# Altium PCB Oscilloscope.PcbDoc
Units mil, origin at the board's own origin, x right, y up, seen from the top; angles counter-clockwise.
Board outline 5995 x 4030 mil, 2 copper layers (Top Layer, Bottom Layer); 74 components, 65 nets, 283 pads, 22 vias.
Unrouted connection lines stored in the file: 1.
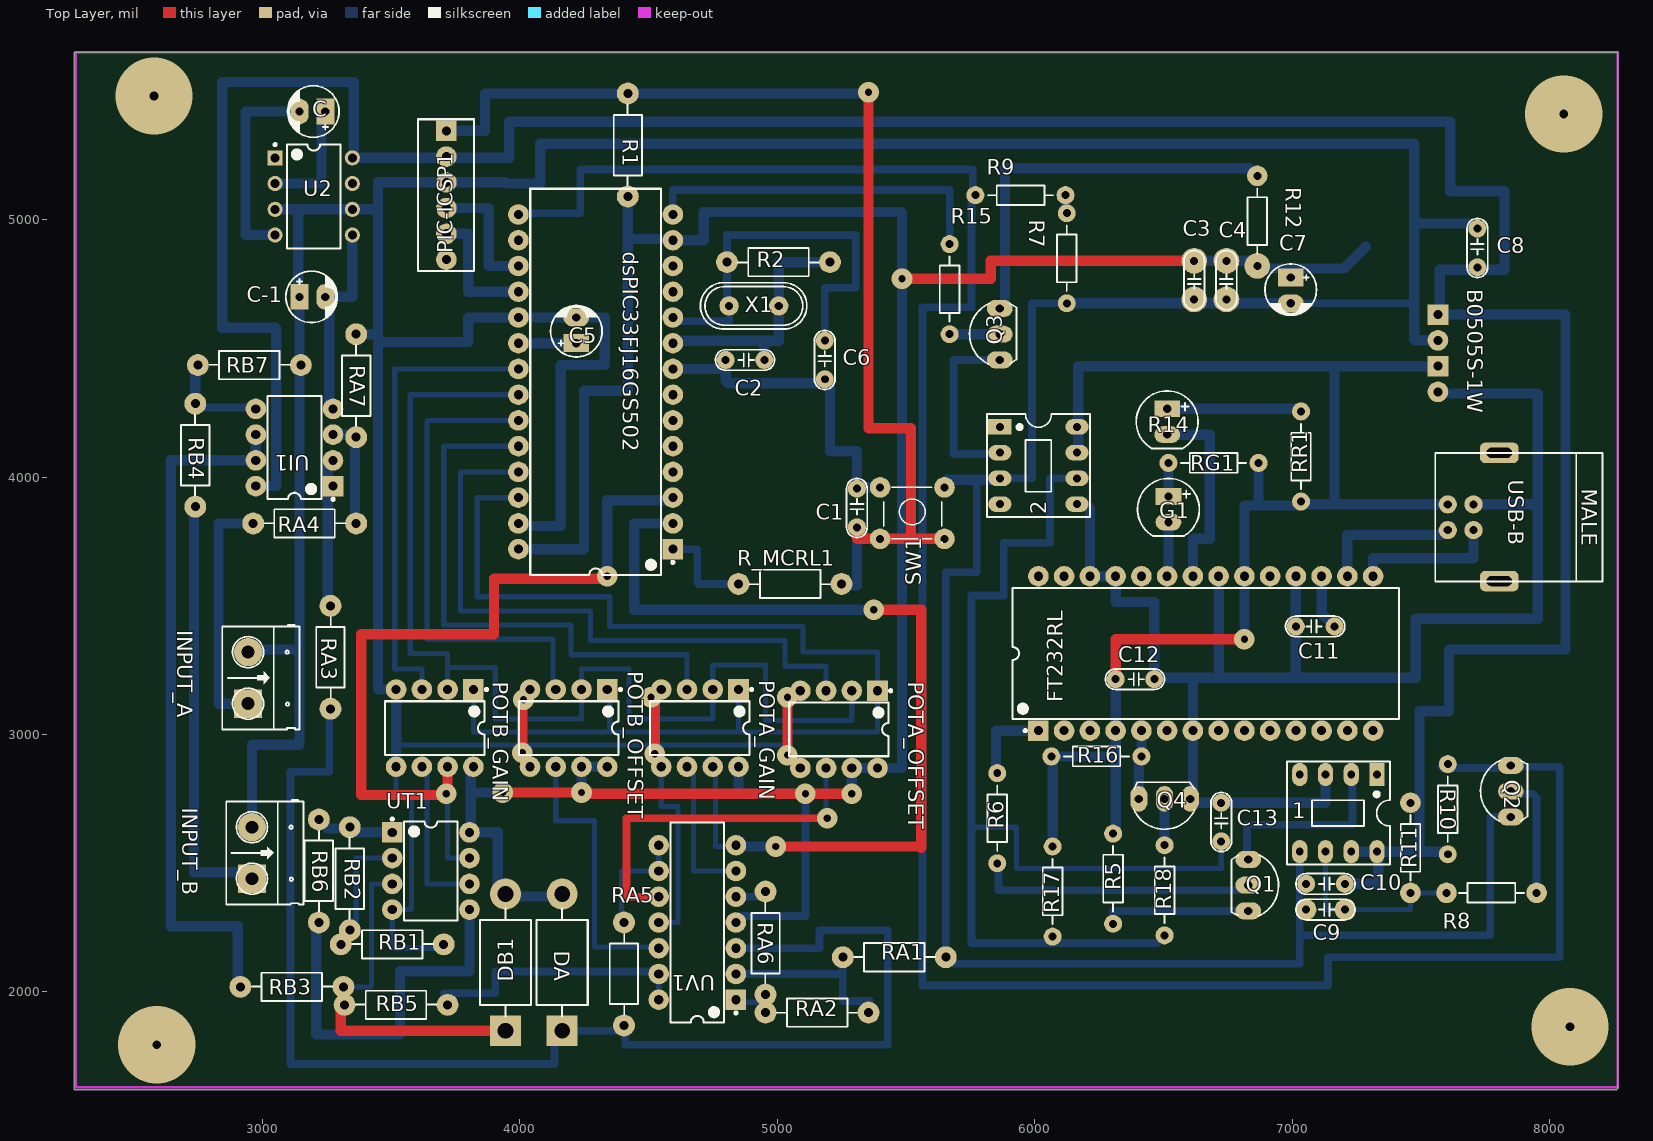
[diagram p0: Top Layer view]
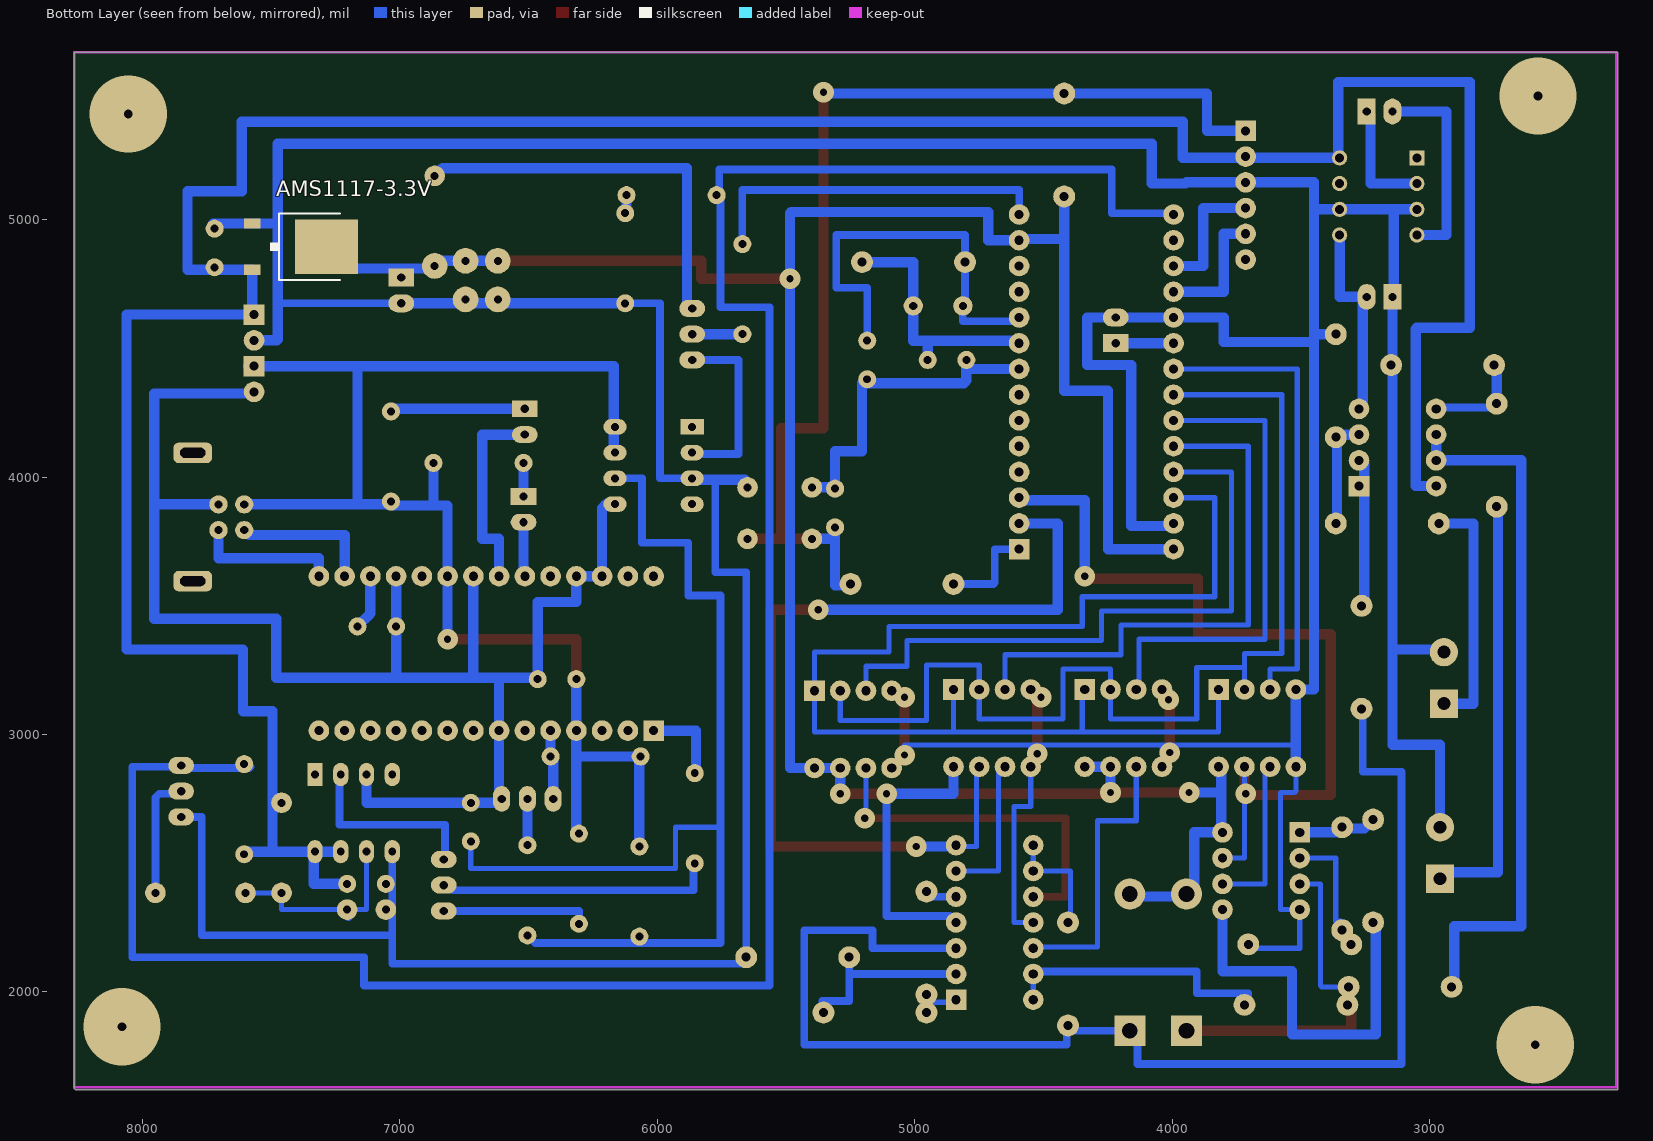
[diagram p1: Bottom Layer view, seen from below]
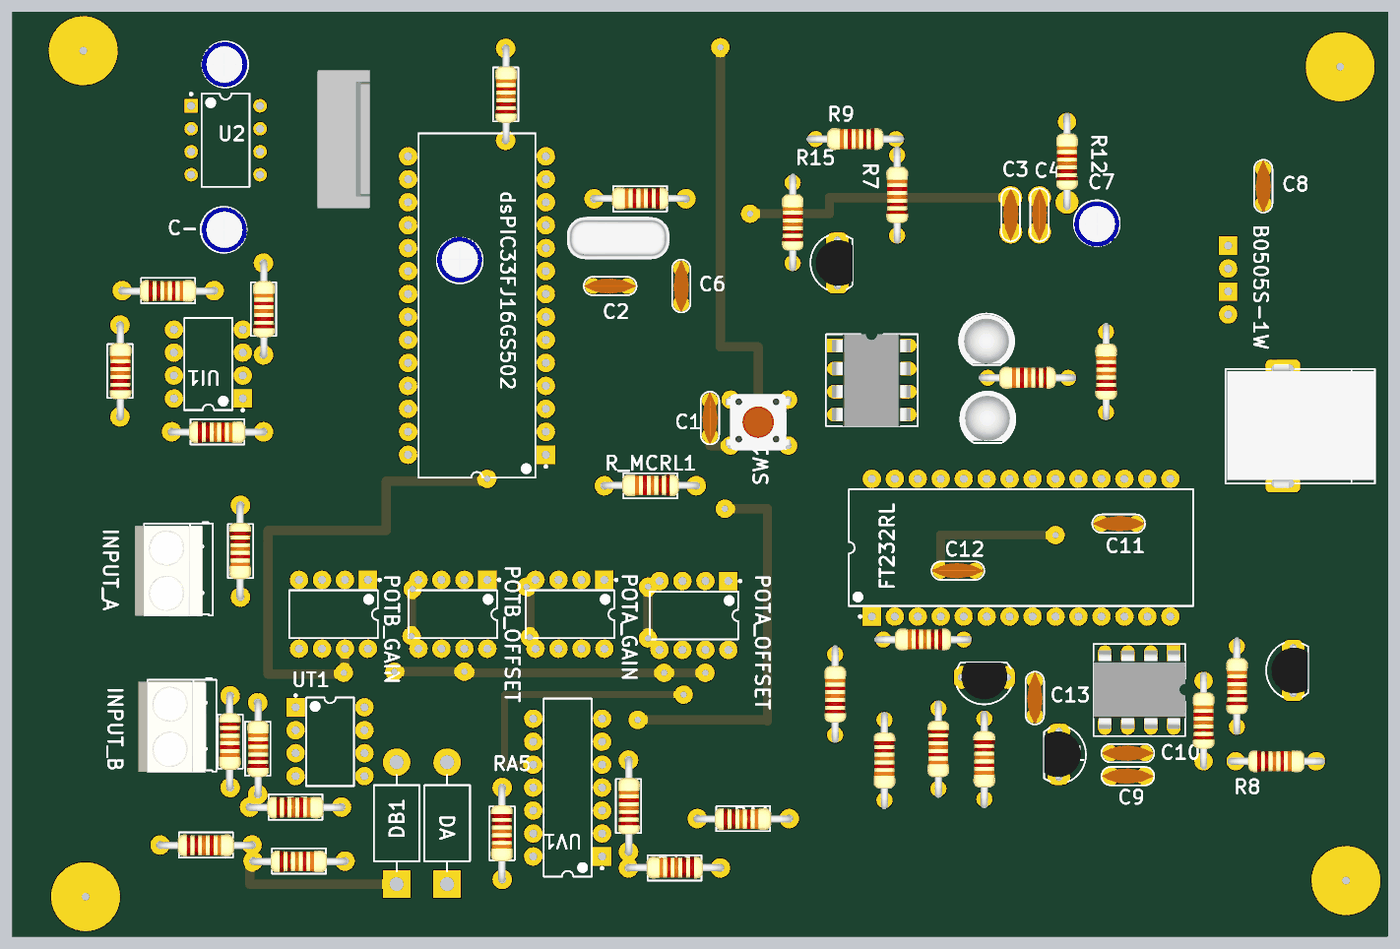
[diagram p2: 3D render of the assembled board from above, using the file's embedded part models]

## Layer stack, top to bottom
Top Solder: solder mask 0.4, Solder Resist, Dk 3.5
Top Layer: signal copper 1.4
Dielectric 1: dielectric 12.6, FR-4, Dk 4.8
Bottom Layer: signal copper 1.4
Bottom Solder: solder mask 0.4, Solder Resist, Dk 3.5

## Board outline
2270,5650 8265,5650 8265,1625 8260,1620 2270,1620

## Design rules (kind name [scope] priority, off if disabled: settings)
Clearance [All] p1: gap=20
PolygonConnect [All] p1: connectstyle=Relief reliefconductorwidth=10 reliefentries=4 polygonreliefangle="90 Angle" airgapwidth=10
RoutingVias [All] p1: holewidth=28 width=80 viastyle="Through Hole" minholewidth=28 minwidth=80 maxholewidth=280 maxwidth=500
SolderMaskExpansion [All] p1: expansion=4
Width [All] p1: maxlimit=100 minlimit=10 preferedwidth=40
30 further rules are at their usual default settings.

## Components (designator, comment, footprint, x,y, rotation, side; value= is the part's Value field where it differs from the comment)
1 "6N137" DIP8/W0.3 7330,2845 r180 top
2 "6N137" DIP8/W0.3 5865,4195 r270 top
AMS1117-3.3V "AMS1117-3V3" TO-252 7355,4875 r270 bottom
B0505S-1W "DC=DC" B050S-1W 7555,4480 r90 top
C "10uF" CP1/2 3245,5420 r180 top
C1 "27" CN1.5#1 5310,3955 r270 top
C2 "33p" CN1.5#1 4950,4455 r180 top
C3 "104" CN1.5#2 6620,4690 r90 top
C4 "104" CN1.5#2 6745,4690 r90 top
C5 "10uF" CP1/2 4220,4520 r90 top
C6 "33p" CN1.5#1 5185,4530 r270 top
C7 "10uF" CP1/2 6995,4775 r270 top
C8 "27" CN1.5#1 7720,4965 r270 top
C9 "15p" CN1.5#3 7205,2320 r180 top
C10 "104" CN1.5#1 7205,2420 r180 top
C11 "104" CN1.5#1 7015,3420 r0 top
C12 "104" CN1.5#1 6465,3215 r180 top
C13 "15p" CN1.5#1 6725,2735 r270 top
C-1 "10uF" CP1/2 3145,4700 r0 top
DA "1N5822" ONSC-AXIAL_LEAD-2-267-05_V 4165,2115 r270 top
DB1 "1N5822" ONSC-AXIAL_LEAD-2-267-05_V 3945,2115 r270 top
dsPIC33FJ16GS502 "DSPIC33FJ16GS502-E/SP" DIP28W 4295,4370 r180 top
FT232RL "FT232RL" DIP28W 6665,3315 r90 top
G1 "LED" LED-5-Green 6520,3925 r270 top
INPUT_A "Header 2" HED2 2945,3320 r270 top
INPUT_B "Header 2" HED2 2960,2640 r270 top
PIC-ICSP1 "PIC-ICSP-UART" "HDR1X6 - L" 3715,5345 r270 top
POTA_GAIN "MCP41010-I/P" PDIP300-P8 4700,3025 r270 top
POTA_OFFSET "MCP41100-I/P" PDIP300-P8 5240,3020 r270 top
POTB_GAIN "MCP41010-I/P" PDIP300-P8 3670,3025 r270 top
POTB_OFFSET "MCP41100-I/P" PDIP300-P8 4190,3025 r270 top
Q1 "2N2222" QTO-92 6830,2415 r270 top
Q2 "2N2222" QTO-92 7850,2780 r90 top
Q3 "2N2222" QTO-92 5865,4555 r90 top
Q4 "2N2222" QTO-92 6505,2750 r180 top
R1 "10k" R1/2W 4420,5490 r270 top
R2 "1M" R1/2W 4805,4835 r0 top
R5 "330" R1/4W#1 6305,2265 r90 top
R6 "1k" R1/4W#1 5855,2850 r270 top
R7 "10k" R1/4W#1 6125,5025 r270 top
R8 "1k" R1/4W#2 7950,2385 r180 top
R9 "10k" R1/4W#1 5770,5095 r0 top
R10 "10k" R1/4W#1 7605,2885 r270 top
R11 "330" R1/4W#2 7460,2735 r270 top
R12 "330" R1/4W#3 6865,5170 r270 top
R14 "LED" LED-5-RED 6515,4265 r270 top
R15 "1k" R1/4W#1 5670,4905 r270 top
R16 "10k" R1/4W#1 6065,2915 r0 top
R17 "330" R1/4W#1 6070,2215 r90 top
R18 "1k" R1/4W#1 6505,2220 r90 top
R_MCRL1 "330" R1/2W 4850,3585 r0 top
RA1 "10k" R1/2W 5655,2135 r180 top
RA2 "10k" R1/2W 4955,1920 r0 top
RA3 "10k" R1/2W 3265,3100 r90 top
RA4 "1M" R1/2W 3365,3820 r180 top
RA5 "10k" R1/2W 4405,1870 r90 top
RA6 "1k" R1/2W 4955,2390 r270 top
RA7 "100k" R1/2W 3365,4555 r270 top
RB1 "10k" R1/2W 3705,2185 r180 top
RB2 "10k" R1/2W 3340,2640 r270 top
RB3 "10k" R1/2W 3315,2020 r180 top
RB4 "1M" R1/2W 2740,4285 r270 top
RB5 "10k" R1/2W 3720,1950 r180 top
RB6 "10k" R1/2W 3220,2270 r90 top
RB7 "100k" R1/2W 3150,4435 r180 top
RG1 "330" R1/4W#1 6520,4055 r0 top
RR1 "330" R1/4W#1 7035,4255 r270 top
SW1 "SW" SW4 5400,3960 r0 top
U2 "ICL7660S" DIP-8 3200,5090 r0 top
UI1 "NE5532P" TI-P8 3125,4115 r180 top
USB-B "USB" USB-B-MALE 7705,3845 r270 top
UT1 "MCP6022-I/P" PDIP300-P8 3655,2470 r0 top
UV1 "MCP6024-I/P" PDIP300-P14 4690,2270 r180 top
X1 "8MHz" XT2 4910,4665 r0 top

## Footprints (in the part's own frame and the unit in brackets; to place one, negate y for a bottom-side part, rotate by r counter-clockwise, add the part's x,y. Pads: shape width x height; smd on the part's side, far side on the other; paste and mask are expansions set on the pad)
B050S-1W [mm]
  round 2.032 hole 0.9: 1(-3.78,-0.3) 3(1.3,-0.3)
  rect 2.032x2.032 hole 0.9: 2(-1.24,-0.3) 4(3.84,-0.3)
CN1.5#1 [mil]
  round 70 hole 31: 1(0,0) 2(150,0)
  silkscreen extent -40,-40 190,40, body extent -40,-33 190,33, height 235
CN1.5#2 [mil]
  round 100 hole 31: 1(0,0) 2(150,0)
  silkscreen extent -40,-40 190,40, body extent -40,-33 190,33, height 235
CN1.5#3 [mil]
  round 80 hole 31: 1(0,0) 2(150,0)
  silkscreen extent -40,-40 190,40, body extent -40,-33 190,33, height 235
CP1/2 [mil] "Tu hoa < 22uF/16>50V"
  rect 70x100 hole 32: 1(0,0)
  oval 70x100 hole 32: 2(100,0)
  silkscreen extent -53,-100 147,100, body extent -49,-99 149,99, height 287
DIP8/W0.3 [mil] "8 PIN, W 300mil, Pin to pin 100mil"
  rect 60x90 hole 31: 1(0,0)
  oval 60x90 hole 31: 2(100,0) 3(200,0) 4(300,0) 5(300,300) 6(200,300) 7(100,300) 8(0,300)
  silkscreen extent -50,-50 350,350, body extent -50,-40 350,336, height 201
DIP28W [mil] "DIP, 28-Leads, Row Spacing 15.24mm, Pitch 2.54mm, Body 37.02x13.72mm"
  rect 80x80 hole 35.43: 1(-300,650)
  round 80 hole 35.43: 2(-300,550) 3(-300,450) 4(-300,350) 5(-300,250) 6(-300,150) 7(-300,50) 8(-300,-50) 9(-300,-150) 10(-300,-250) 11(-300,-350) 12(-300,-450) 13(-300,-550) 14(-300,-650) 15(300,-650) 16(300,-550) 17(300,-450) 18(300,-350) 19(300,-250) 20(300,-150) 21(300,-50) 22(300,50) 23(300,150) 24(300,250) 25(300,350) 26(300,450) 27(300,550) 28(300,650)
  silkscreen extent -305,-750 254,750, body extent -263,-750 263,750, height 194
DIP-8 [mm] "DIP; 8 Leads; Row Spacing 7.62 mm; Pitch 2.54 mm"
  rect 1.5x1.5 hole 0.9: 1(-3.81,3.81)
  round 1.5 hole 0.9: 2(-3.81,1.27) 3(-3.81,-1.27) 4(-3.81,-3.81) 5(3.81,-3.81) 6(3.81,-1.27) 7(3.81,1.27) 8(3.81,3.81)
  silkscreen extent -3.93,-5.15 2.65,5.23, body extent -3.6,-5.15 3.6,5.15, height 5.08
"HDR1X6 - L" [mil] "Connector; Header; 6 Position"
  rect 80x80 hole 35.43: 1(0,0)
  round 80 hole 35.43: 2(100,0) 3(200,0) 4(300,0) 5(400,0) 6(500,0)
  silkscreen extent -45,-110 545,108, body extent -50,-115 550,113, height 461
HED2 [mil] "Header 2, 2 pin, hight 300mil, Pin to Pin 200, Colour Green"
  round 110 hole 50: 1(0,0)
  rect 110x110 hole 50: 2(200,0)
  silkscreen extent -106,-100 300,200, body extent -92,-140 302,155, height 394
LED-5-Green [mil] "LED 2 PIN, 5 ly , Only colour,pin to pin 100mil"
  rect 65x100 hole 32: 1(0,0)
  oval 65x100 hole 32: 2(100,0)
  silkscreen extent -70,-120 154,120, body extent -69,-120 145,117, height 339
LED-5-RED [mil] "LED 2 PIN, 5 ly , Only colour,pin to pin 100mil"
  rect 65x100 hole 32: 1(0,0)
  oval 65x100 hole 32: 2(100,0)
  silkscreen extent -70,-120 154,120, body extent -65,-119 149,118, height 339
ONSC-AXIAL_LEAD-2-267-05_V [mil] "AXIAL, 2-Leads, Diameter 5.05mm"
  round 120 hole 61.02: 1(-265.55,0)
  rect 120x120 hole 61.02: 2(265.55,0)
  silkscreen extent -209,-99 209,99
PDIP300-P8 [mil] "DIP, 8-Leads, Row Spacing 7.62mm, Pitch 2.54mm, Body 9.5x6.6mm"
  rect 80x80 hole 35.43: 1(-150,150)
  round 80 hole 35.43: 2(-150,50) 3(-150,-50) 4(-150,-150) 5(150,-150) 6(150,-50) 7(150,50) 8(150,150)
  silkscreen extent -155,-193 104,206, body extent -140,-193 140,193, height 210
PDIP300-P14 [mil] "DIP, 14-Leads, Row Spacing 7.62mm, Pitch 2.54mm, Body 19.2x6.6mm"
  rect 80x80 hole 35.43: 1(-150,300)
  round 80 hole 35.43: 2(-150,200) 3(-150,100) 4(-150,0) 5(-150,-100) 6(-150,-200) 7(-150,-300) 8(150,-300) 9(150,-200) 10(150,-100) 11(150,0) 12(150,100) 13(150,200) 14(150,300)
  silkscreen extent -155,-388 104,388, body extent -140,-388 140,388, height 210
QTO-92 [mil] "TO-92"
  oval 66x100 hole 32: 1(-100,0) 2(0,0) 3(100,0)
  silkscreen extent -117,-65 120,118, body extent -109,-66 109,95, height 245
R1/2W [mil] "R 1/2W, 2 pin, 300mil"
  round 85 hole 35: 1(0,0) 2(400,0)
  silkscreen extent 42,-55 356,55, body extent -12,-45 414,49, height 91
R1/4W#1 [mil] "R 1/4W, 2 Pin, 350mil"
  round 70 hole 31: 1(0,0) 2(350,0)
  silkscreen extent 48,-38 302,38, body extent -40,-47 386,47, height 111
R1/4W#2 [mil] "R 1/4W, 2 Pin, 350mil"
  round 80 hole 31: 1(0,0) 2(350,0)
  silkscreen extent 48,-38 302,38, body extent -40,-47 386,47, height 111
R1/4W#3 [mil] "R 1/4W, 2 Pin, 350mil"
  round 80 hole 31: 1(0,0)
  round 100 hole 31: 2(350,0)
  silkscreen extent 48,-38 302,38, body extent -40,-47 386,47, height 111
SW4 [mil] "SW button 4pin, 250 x250 mil"
  round 80 hole 31: 1(0,0) 2(250,-200) 3(250,0) 4(0,-200)
  silkscreen extent 15,-215 240,0, body extent -36,-220 276,24, height 276
TI-P8 [mil] "DIP, 8-Leads, Body 9.59x6.35mm, Pitch 2.54mm"
  rect 80x80 hole 35.43: 1(-150,150)
  round 80 hole 35.43: 2(-150,50) 3(-150,-50) 4(-150,-150) 5(150,-150) 6(150,-50) 7(150,50) 8(150,150)
  silkscreen extent -155,-201 104,206, body extent -155,-200 155,200, height 200
TO-252 [mil]
  rect 40x63 smd: 1(-109.76,-218.98) 3(70,-218.98)
  rect 213x245 smd: 2(-20,69)
  silkscreen extent -149,-149 110,121, body extent -149,-219 109,173, height 90
USB-B-MALE [mm] "USB B connector, 4pin, For Print"
  round 1.8 hole 0.8: 1(-1.245,-2.54) 2(1.295,-2.54) 3(1.295,0) 4(-1.245,0)
  rrect50% 2.032x3.81 hole 1 slot 2.5 at 90 deg: 5(-6.325,2.54) 6(6.325,2.54)
  silkscreen extent -6.32,-3.78 6.38,12.73, body extent -7.53,-3.61 7.37,12.69, height 11.34
XT2 [mm] "Footpin for Crystal 2 pin"
  round 1.905 hole 0.8: 1(-2.45,0) 2(2.45,0)
  silkscreen extent -5.28,-2.29 5.21,2.29, body extent -5.68,-2.36 5.68,2.29, height 3.5

## Part data
B0505S-1W: library part B050S-1W, "NGUON CACH LY"
C C5 C7 C-1: library part CP1, "Cap P  0,1uF < 22uF , 16 - 50V"
C1 C2 C3 C4 C6 C8 C9 C10 C11 C12 C13: library part CN1.5, "Cap np 682pF => 104pF"
DA DB1: "Rectifier, 2-Pin Axial_Lead, Bulk Bag"
dsPIC33FJ16GS502: "High-Performance 16-bit Digital Signal Controller, 16 KB Flash, 2 KB RAM , 28-Pin SPDIP, Extended High Temperature"
FT232RL: library part FT232RL-Tube, "USB UART Asynchronous Serial Data Transfer Chip, 28-pin SSOP, Tube"
G1 R14: "LED Single colour Green and Red"
INPUT_A INPUT_B: library part Hed2, "Header 2 (Green)"
PIC-ICSP1: library part "Header 6L", "Header, 6-Pin"
POTA_GAIN POTB_GAIN: library part MCP41100-I/P, "Single/Dual Digital Potentiometer with SPI Interface, 8-Pin PDIP, Industrial Temperature"
POTA_OFFSET POTB_OFFSET: "Single/Dual Digital Potentiometer with SPI Interface, 8-Pin PDIP, Industrial Temperature"
Q1 Q2 Q3 Q4: library part NPN_EBC, "P 600mW, EBC"
R1 R2 R5 R6 R7 R8 R9 R10 R11 R12 R15 R16 R17 R18 R_MCRL1 RA1 RA2 RA3 RA4 RA5 RA6 RA7 RB1 RB2 RB3 RB4 RB5 RB6 RB7 RG1 RR1: library part R1/4W, "Resistor 1/4W"
SW1: library part SW4, "Switch button 4 pin"
U2: library part ICL7660CPAZ
UI1: "Dual Low-Noise High-Speed Audio Operational Amplifier, 10 to 30 V, 0 to 70 degC, 8-pin DIP (P8), Pb-Free (RoHS)"
USB-B: "USB connector"
UT1: "Rail-to-Rail Input/Output, 10 MHz Operational Amplifier, 8-Pin PDIP, Industrial Temperature"
UV1: "Rail-to-Rail Input/Output, 10 MHz Operational Amplifier, 14-Pin PDIP, Industrial Temperature"
X1: library part XT2, "Crystal For all Crystal 2pin."

## Via types
v1: diameter 80, hole 28, Top Layer to Bottom Layer, 18 vias
v2: diameter 300, hole 34, Top Layer to Bottom Layer, 4 vias

## Nets (pads, with @x,y where several pads share a name; then routed paths per layer and width w, separated by ;. In a path a pad name is that pad's centre, name@x,y a point inside that pad or via, vN(x,y) a via of type N, cw(c..) or ccw(c..) an arc to the next point about the centre after c; other vN are vias at no path point)
5V: 1.7 1.8 AMS1117-3.3V.3 B0505S-1W.4 C8.2 C10.1 PIC-ICSP1.2 R10.2 R11.1 U2.8 UI1.8 | length 12044.8
  Bottom Layer w40: UI1.8 3055,3965 3055,4575 3050,4580 2845,4580 2845,5535 3355,5535 3355,5245 U2.8 3710,5240 PIC-ICSP1.2 3720,5240 3960,5240 3960,5380 7615,5380 7615,5110 7825,5110 7825,4805 AMS1117-3.3V.3 7573.98,4638.35 B0505S-1W.4 8061.32,4631.18 8062.5,4630 8062.5,3330 7610,3330 7610,3090 7495,3090 7495,2545 ; C10.1 7335,2420 1.8@7335,2545 ; 1.7@7235,2545 1.8@7335,2545 ; R10.2@7590,2545 7495,2545 ; 1.8@7335,2545 7495,2545
-5V: C-1.2 U2.5 UI1.4 | length 792.4
  Bottom Layer w40: UI1.4 3260,4280 3260,4685 C-1.2 3350,4700 U2.5
CHANNELA: dsPIC33FJ16GS502.2 POTA_GAIN.7 UV1.7 | length 3645.4
  Top Layer w40: v1(4995,2565) 5555,2565 5560,2560 5560,3485 v1(5375,3485)
  Bottom Layer w20: POTA_GAIN.7 4760,2865 4760,2565 UV1.7@4835,2565 ; UV1.7 UV1.7@4845,2565
  Bottom Layer w40: dsPIC33FJ16GS502.2 4445,3820 4445,3485 v1(5375,3485) ; UV1.7@4835,2565 UV1.7 ; UV1.7@4845,2565 v1(4995,2565)
CHANNELB: dsPIC33FJ16GS502.3 POTB_GAIN.7 UT1.7 | length 3253.6
  Top Layer w40: POTB_GAIN.7 3720,2775 3710,2765 3385,2765 3385,3390 3900,3390 3900,3605 4330,3605 v1(4340,3615)
  Bottom Layer w20: POTB_GAIN.7@3715,2870 POTB_GAIN.7 3720,2520 UT1.7
  Bottom Layer w40: v1(4340,3615) 4340,3910 4585,3910 dsPIC33FJ16GS502.3 dsPIC33FJ16GS502.3@4605,3910
  other v1: 3715,2770
CS: dsPIC33FJ16GS502.26 POTA_GAIN.1 POTA_OFFSET.1 POTB_GAIN.1 POTB_OFFSET.1 | length 4644.1
  Bottom Layer w20: POTB_GAIN.1 3820,3010 4350,3010 ; dsPIC33FJ16GS502.26 3835,3920 3835,3535 4350,3535 4350,3420 5100,3420 5100,3320 5390,3320 POTA_OFFSET.1 5390,3010 4350,3010 ; POTB_OFFSET.1@4340,3160 4350,3150 4350,3010 ; 4850,3015 POTA_GAIN.1@4850,3145
GND: 1.5 2.3 AMS1117-3.3V.1 B0505S-1W.3 C1.1 C2.2 C3.1 C4.1 C5.2 C6.2 C7.2 C8.1 C9.2 C10.2 C-1.1 dsPIC33FJ16GS502.8 dsPIC33FJ16GS502.19 dsPIC33FJ16GS502.27 INPUT_A.1 INPUT_B.1 PIC-ICSP1.3 POTA_GAIN.4 POTA_GAIN.5 POTA_OFFSET.4 POTA_OFFSET.5 POTB_GAIN.4 POTB_GAIN.5 POTB_OFFSET.4 POTB_OFFSET.5 Q2.1 R7.2 RA1.1 RA7.1 RB1.1 RB7.1 SW1.1 SW1.3 U2.3 U2.6 UT1.4 UV1.11 | length 26894.5
  Top Layer w20: v1@4010,3145 POTB_OFFSET.4
  Top Layer w40: v1(4010,2930) v1@4010,3145 ; v1(4525,2925) POTA_GAIN.4@4525,3150 ; v1(5040,2920) v1(5040,3145)
  Bottom Layer w20: POTB_GAIN.5 3520,2780 3525,2775 3580,2775 3580,2320 UT1.4 3505,2170 3665,2170 ; 3520,2960 4040,2960 ; dsPIC33FJ16GS502.27 dsPIC33FJ16GS502.27@4005,3810 ; POTB_OFFSET.5 4040,2960 ; UV1.11 4615,2270 4615,2720 4550,2720 POTA_GAIN.5 4550,2960 ; POTA_OFFSET.5 v1(5040,2920) 5040,2960 4550,2960 ; 4040,2960 4550,2960
  Bottom Layer w30: 5775,3975 5775,3630 5655,3630 5655,2110 7030,2110 1.5 ; 2.3 5990,3995 5990,4675 R7.2 ; 6295,4675 7475,4675 ; 7030,2220 7770,2220 7770,2680 Q2.1 ; C10.2@7035,2440 7039.62,2416.92 C10.2@7040,2415 ; B0505S-1W.3@7533.82,4531.18 B0505S-1W.3
  Bottom Layer w40: INPUT_A.1@2925,3330 3145,3330 ; INPUT_B.1 2960,2960 3145,2960 3145,3330 ; U2.3 3140,5040 ; RA7.1 3445,4555 3450,4550 ; POTB_GAIN.5 3520,2960 POTB_GAIN.4 3450,3175 3450,4525 ; dsPIC33FJ16GS502.27@4005,3810 4160,3810 4160,4435 4330,4435 4330,4620 C5.2 dsPIC33FJ16GS502.19 3800,4620 3800,4525 3450,4525 ; dsPIC33FJ16GS502.8 4785,4420 ; C2.2 4800,4375 4810,4365 5205,4365 5205,4100 5310,4100 C1.1@5310,3985 ; C1.1@5310,3940 5330,3960 SW1.1 ; SW1.3@5630,3960 5660,3990 2.3@5865,3990 ; R7.2 6295,4675 C7.2 ; B0505S-1W.3@7533.82,4531.18 7478.82,4531.18 7475,4535 7475,4675 7475,4985 ; AMS1117-3.3V.1 AMS1117-3.3V.1@7573.98,4985 ; C8.1@7725,4985 AMS1117-3.3V.1@7573.98,4985 ; 3140,5040 U2.6 3450,5040 ; 3140,5040 3140,4705 C-1.1 3145,3330 ; 3450,4525 3450,4550 ; 3450,4550 3450,5040 ; 3450,5040 3450,5145 PIC-ICSP1.3 3945,5145 3950,5140 4080,5140 4080,5295 7475,5295 7475,4985 ; 7475,4985 AMS1117-3.3V.1@7573.98,4985
  other v1: 4015,3135 4510,3145
GND-H: 1.3 2.5 B0505S-1W.1 C11.1 C12.1 C13.1 FT232RL.7 FT232RL.18 FT232RL.21 FT232RL.25 FT232RL.26 Q4.1 USB-B.4 | length 6118.9
  Bottom Layer w20: Q4.1 Q4.1@6615,2760
  Bottom Layer w40: 2.5 6200,3895 6215,3880 FT232RL.26 FT232RL.25 6315,3515 6465,3515 C12.1 ; C12.1@6470,3220 6615,3220 ; Q4.1 6620,2735 C13.1 7130,2735 1.3 ; Q4.1@6615,2760 FT232RL.7 6615,3220 ; FT232RL.21 6715,3220 ; FT232RL.18 7015,3220 ; B0505S-1W.1@7575,4322.99 B0505S-1W.1 7572.99,4325 7955,4325 7955,3894 ; USB-B.4 7955,3894 ; 6615,3220 6715,3220 ; 6715,3220 7015,3220 ; 7015,3220 7480,3220 7480,3450 7955,3450 7955,3894
MCLR: C1.2 PIC-ICSP1.1 R1.1 R_MCRL1.2 SW1.2 SW1.4 | length 4399.1
  Top Layer w40: C1.2 5310,3760 SW1.4 SW1.2 ; v1(5355,5495) 5355,4190 5520,4190 5520,3765
  Bottom Layer w30: v1@5350,5490 v1(5355,5495)
  Bottom Layer w40: PIC-ICSP1.1 3865,5345 3865,5490 R1.1@4395,5490 ; R1.1 v1@5350,5490 ; R_MCRL1.2@5255,3580 5310,3580 5310,3765 ; C1.2@5310,3790 5310,3765 ; SW1.4 5315,3760 5310,3765
Net1_2: 1.2 Q1.1 | length 750
  Bottom Layer w30: Q1.1@6850,2530 6825,2530 6825,2650 7235,2650 1.2@7235,2845
Net1_6: 1.6 C9.1 R8.2 R11.2 | length 767.1
  Bottom Layer w20: 1.6 7130,2320 C9.1 7460,2320 R11.2 R8.2
  Bottom Layer w30: C9.1@7200,2290 C9.1@7205,2295
Net2_2: 2.2 Q3.1 | length 730
  Bottom Layer w30: Q3.1 5685,4455 5685,4090 2.2@5870,4090
Net2_6: 2.6 C13.2 R17.1 R18.1 | length 4247.8
  Bottom Layer w20: 5755,2640 5930,2640 5930,2480 6725,2480 C13.2
  Bottom Layer w30: R17.1 6095,2190 ; 2.6 6060,3995 6060,3745 5880,3745 5880,3540 5755,3540 5755,2190 6095,2190 ; R18.1 6475,2190 6095,2190
NetC5_1: C5.1 dsPIC33FJ16GS502.20 | length 245
  Bottom Layer w40: dsPIC33FJ16GS502.20 C5.1@4240,4520
NetC11_2: C11.2 FT232RL.17 | length 215.7
  Bottom Layer w40: FT232RL.17 7115,3470 C11.2
NetC_1: C.1 U2.2 | length 466.2
  Bottom Layer w40: U2.2 3230,5140 3230,5405 C.1
NetC_2: C.2 U2.4 | length 805
  Bottom Layer w40: U2.4 2935,4940 2935,5420 C.2
NetDA_2: DA.2 RA3.1 RA5.1 UV1.3 | length 5168.4
  Bottom Layer w30: RA3.1@3280,3105 3260,3085 3260,2855 3110,2855 3110,1720 4135,1720 4135,1849.45 DA.2 RA5.1@4405,1849.45 ; RA5.1 4410,1865 4410,1795 5430,1795 5430,2239.29 5165,2239.29 5165,2170 UV1.3
NetDB1_2: DB1.2 RB3.1 RB5.2 UT1.3 | length 1315.7
  Top Layer w20: 3305,1850 3305.55,1849.45 ; DB1.2@3905.55,1830 DB1.2@3915,1839.45
  Top Layer w40: 3305,1850 RB5.2@3305,1945 ; 3305.55,1849.45 DB1.2@3915,1849.45
  Bottom Layer w20: RB3.1@3305,2020 3420,2020 3425,2025 3425,2420 UT1.3
NetdsPIC33FJ16GS502_1: dsPIC33FJ16GS502.1 R_MCRL1.1 | length 416.2
  Bottom Layer w30: dsPIC33FJ16GS502.1 4690,3720 4690,3590 4695,3585 R_MCRL1.1@4825,3585 ; R_MCRL1.1@4835,3560 4835,3575 R_MCRL1.1@4825,3585 ; R_MCRL1.1 R_MCRL1.1@4825,3585
NetG1_1: G1.1 RG1.1 | length 130
  Bottom Layer w40: G1.1 RG1.1
NetINPUT_A_2: INPUT_A.2 RA4.2 | length 950
  Bottom Layer w40: INPUT_A.2 2830,3120 2830,3820 RA4.2
NetINPUT_B_2: INPUT_B.2 RB4.2 | length 1640.4
  Bottom Layer w40: RB4.2@2735,3870 2735,2465 2935,2465 INPUT_B.2
NetPOTA_GAIN_6: POTA_GAIN.6 UV1.6 | length 580.4
  Bottom Layer w20: POTA_GAIN.6 4675,2850 4675,2470 UV1.6
NetPOTA_OFFSET_6: POTA_OFFSET.6 UV1.10 | length 1419.1
  Top Layer w30: UV1.10 4415,2370 4415,2675 v1(5195,2675)
  Bottom Layer w20: POTA_OFFSET.6 5190,2675 v1@5200,2665
NetPOTB_GAIN_6: POTB_GAIN.6 UT1.6 | length 649.5
  Bottom Layer w20: POTB_GAIN.6 3640,2855 3640,2420 UT1.6
  Bottom Layer w40: POTB_GAIN.6@3605,2860 POTB_GAIN.6
NetPOTB_OFFSET_6: POTB_OFFSET.6 UV1.12 | length 1102.1
  Bottom Layer w20: POTB_OFFSET.6 4140,2665 4290,2665 4290,2175 4535,2175 UV1.12
NetQ1_2: Q1.2 R6.2 | length 1038.3
  Bottom Layer w30: R6.2@5860,2470 5860,2395 6795,2395 Q1.2@6815,2415
NetQ1_3: Q1.3 R5.1 | length 601.2
  Bottom Layer w20: Q1.3@6835,2315 Q1.3@6850,2330
  Bottom Layer w30: R5.1 6305,2315 Q1.3@6835,2315
NetQ2_2: Q2.2 R8.1 | length 486.2
  Bottom Layer w30: Q2.2@7845,2770 7935,2770 7950,2755 R8.1@7950,2380
NetQ3_2: Q3.2 R15.2 | length 220
  Bottom Layer w40: R15.2@5655,4555 Q3.2@5875,4555
NetQ3_3: Q3.3 R12.1 | length 1542.4
  Bottom Layer w40: Q3.3@5885,4650 5885,5200 6835,5200 R12.1
NetQ4_2: Q4.2 R18.2 | length 180
  Bottom Layer w40: R18.2 Q4.2
NetR7_1: R7.1 R9.2 | length 72.1
  Bottom Layer w30: R7.1@6120,5030 R7.1
  Bottom Layer w40: R7.1@6120,5030 R9.2
NetR14_1: R14.1 RR1.1 | length 527.1
  Bottom Layer w20: RR1.1@7035,4235 RR1.1@7040,4240
  Bottom Layer w40: R14.1 RR1.1@7035,4265
NetRA1_2: RA1.2 RA2.2 UV1.2 | length 737.1
  Bottom Layer w30: UV1.2 5255,2070 ; RA1.2 5255,2070 ; RA2.2 5360,1925 5360,1965 5255,1965 5255,2070
NetRA2_1: RA2.1 RA6.2 UV1.1 | length 94.1
  Bottom Layer w20: UV1.1 4850,1960 RA6.2@4930,1960
NetRA3_2: RA3.2 UI1.1 UI1.2 | length 575.6
  Bottom Layer w40: RA3.2@3255,3500 3255,4051.4 UI1.2
NetRA4_1: RA4.1 RA7.2 UI1.3 | length 432.1
  Bottom Layer w40: UI1.3 3360,4165 3360,3825 RA4.1
NetRA5_2: RA5.2 UV1.8 UV1.9 | length 448.3
  Bottom Layer w20: RA5.2@4415,2275 4395,2295 4395,2470 UV1.9 UV1.8
NetRA6_1: RA6.1 UV1.5 | length 123.3
  Bottom Layer w30: UV1.5 4935,2370 RA6.1
NetRB1_2: RB1.2 RB2.2 UT1.2 | length 547.8
  Bottom Layer w20: RB1.2@3290,2155 3345,2210 3345,2275 3365,2275 3365,2520 UT1.2
NetRB2_1: RB2.1 RB6.2 UT1.1 | length 305.7
  Bottom Layer w20: RB2.1@3345,2635 RB2.1@3360,2620
  Bottom Layer w40: RB6.2 3255,2635 RB2.1@3345,2635 ; RB2.1@3360,2620 UT1.1
NetRB3_2: RB3.2 UI1.6 UI1.7 | length 2735
  Bottom Layer w40: RB3.2@2905,2020 2905,2255 2645,2255 2645,4065 UI1.7 UI1.6
NetRB4_1: RB4.1 RB7.2 UI1.5 | length 391.2
  Bottom Layer w20: UI1.5@2970,4270 UI1.5
  Bottom Layer w30: RB4.1@2740,4270 UI1.5@2970,4270
  Bottom Layer w40: RB4.1 2740,4425 RB7.2
NetRB5_1: RB5.1 UV1.13 UV1.14 | length 1081.2
  Bottom Layer w20: RB5.1@3705,1945 RB5.1@3710,1950 ; UV1.13@4530,2080 UV1.13 UV1.14
  Bottom Layer w30: RB5.1@3705,1945 3705,1995 3905,1995 3905,2080 UV1.13@4530,2080
NetRB6_1: RB6.1 UT1.5 | length 1490
  Bottom Layer w40: RB6.1@3210,2245 3210,1835 3535,1835 3535,2080 3805,2080 UT1.5
OSC1: C2.1 dsPIC33FJ16GS502.9 R2.2 X1.2 | length 1004.1
  Bottom Layer w40: dsPIC33FJ16GS502.9 4595,4530 4960,4530 ; C2.1 4950,4520 4960,4530 ; R2.2 5006.46,4835 X1.2 5006.46,4530 4960,4530
OSC2: C6.1 dsPIC33FJ16GS502.10 R2.1 X1.1 | length 1588.3
  Bottom Layer w30: dsPIC33FJ16GS502.10 4610,4605 4813.54,4605 X1.1 4805,4673.54 R2.1 4805,4940 5305,4940 5305,4735 5185,4735 C6.1@5185,4535
PGC: dsPIC33FJ16GS502.18 PIC-ICSP1.5 | length 505
  Bottom Layer w40: PIC-ICSP1.5 3800,4945 3800,4720 dsPIC33FJ16GS502.18
PGD: dsPIC33FJ16GS502.17 PIC-ICSP1.4 | length 505
  Bottom Layer w40: PIC-ICSP1.4 3880,5045 3880,4820 dsPIC33FJ16GS502.17
RX: dsPIC33FJ16GS502.15 Q2.3 R9.1 R10.1 | length 9096.6
  Bottom Layer w30: dsPIC33FJ16GS502.15 4000,5025 4235,5025 4235,5195 5760,5195 5760,5105 R9.1 5755,5080 5755,4660 5565,4660 5565,2025 7140,2025 7140,2135 8040,2135 8040,2875 7850,2875 7845,2870 7585,2870 R10.1@7580,2875
RX-H: FT232RL.5 Q4.3 R16.2 | length 269.1
  Bottom Layer w40: Q4.3 6405,2905 R16.2 FT232RL.5
RXLED: FT232RL.22 R14.2 | length 780
  Bottom Layer w40: R14.2 6680,4165 6680,3760 6615,3760 FT232RL.22
SCK: dsPIC33FJ16GS502.22 POTA_GAIN.2 POTA_OFFSET.2 POTB_GAIN.2 POTB_OFFSET.2 | length 4410
  Bottom Layer w20: POTB_GAIN.2 3720,3260 ; dsPIC33FJ16GS502.22 3575,4320 3575,3315 3720,3315 3720,3260 ; POTA_OFFSET.2 5290,3055 4955,3055 4955,3270 4750,3270 POTA_GAIN.2 4750,3060 4425,3060 4425,3255 4240,3255 4240,3060 3905,3060 3905,3260 3720,3260
SI1: dsPIC33FJ16GS502.24 POTA_GAIN.3 | length 2180
  Bottom Layer w20: dsPIC33FJ16GS502.24 3705,4120 3705,3425 4200,3425 4200,3310 4650,3310 POTA_GAIN.3
SI2: dsPIC33FJ16GS502.21 POTB_GAIN.3 | length 1830
  Bottom Layer w20: POTB_GAIN.3 3620,3255 3515,3255 3515,4420 dsPIC33FJ16GS502.21
SI3: dsPIC33FJ16GS502.25 POTA_OFFSET.3 | length 2495
  Bottom Layer w20: dsPIC33FJ16GS502.25 3770,4020 3770,3480 4275,3480 4275,3365 5030,3365 5030,3265 5190,3265 POTA_OFFSET.3
SI4: dsPIC33FJ16GS502.23 POTB_OFFSET.3 | length 1894.1
  Bottom Layer w20: dsPIC33FJ16GS502.23 3640,4220 3640,3370 4130,3370 4130,3185 POTB_OFFSET.3
TX: dsPIC33FJ16GS502.14 R15.1 | length 1380
  Bottom Layer w30: dsPIC33FJ16GS502.14 4595,5115 5670,5115 R15.1
TX-H: FT232RL.1 R6.1 | length 300
  Bottom Layer w40: R6.1@5850,2880 5850,3015 FT232RL.1
TXLED: FT232RL.23 G1.2 | length 212.1
  Bottom Layer w40: FT232RL.23 6520,3620 G1.2
USBDM: FT232RL.16 USB-B.2 | length 557.9
  Bottom Layer w40: FT232RL.16 7215,3775 7586,3775 USB-B.2
USBDP: FT232RL.15 USB-B.3 | length 569
  Bottom Layer w40: FT232RL.15 7315,3685 7705,3685 USB-B.3
VCC: AMS1117-3.3V.2 C3.2 C4.2 C7.1 DA.1 DB1.1 dsPIC33FJ16GS502.13 dsPIC33FJ16GS502.28 POTA_GAIN.8 POTA_OFFSET.7 POTA_OFFSET.8 POTB_GAIN.8 POTB_OFFSET.7 POTB_OFFSET.8 R1.2 R12.2 UT1.8 UV1.4 | length 11007.9
  Top Layer w40: v1(3935,2775) v1(4240,2775) 4255,2770 v1(5110,2770) 5265,2770 5270,2775 v1@5280,2765 ; v1(5485,4770) 5830,4770 5830,4840 C3.2
  Bottom Layer w30: UV1.4 4865,2295 5110,2295 v1(5110,2770)
  Bottom Layer w40: UT1.8 UT1.8@3810,2620 ; POTB_GAIN.8 3810,2865 3810,2775 ; DB1.1@3915,2370.55 4125,2370.55 DA.1@4135,2380.55 ; DB1.1@3920,2385.55 3915,2380.55 3915,2620 UT1.8@3810,2620 ; v1(3935,2775) 3810,2775 ; dsPIC33FJ16GS502.28 4250,3720 4250,4335 4420,4335 4420,4925 ; v1(4240,2775) POTB_OFFSET.7 POTB_OFFSET.8 ; R1.2 4420,4925 ; POTA_GAIN.8 4850,2770 v1(5110,2770) ; v1(5290,2770) POTA_OFFSET.7 POTA_OFFSET.8 5485,2870 v1(5485,4770) 5485,5025 5480,5030 4715,5030 4715,4920 dsPIC33FJ16GS502.13 4590,4925 4420,4925 ; C3.2 C4.2 6845,4840 R12.2 ; R12.2@6870,4810 6990,4810 ; C7.1 6995,4805 6990,4810 ; AMS1117-3.3V.2 7201,4810 6990,4810 ; UT1.8@3810,2620 3810,2775
VCC-H: 2.7 2.8 B0505S-1W.2 C12.2 FT232RL.4 FT232RL.20 R5.2 R16.1 R17.2 RG1.2 RR1.2 USB-B.1 | length 5608.2
  Top Layer w40: C12.2 6315,3370 v1(6815,3370)
  Bottom Layer w40: R17.2 6070,2910 R16.1 6305,2915 ; 2.7@6170,4090 6170,4430 7165,4430 ; R5.2 6315,2625 FT232RL.4 C12.2 ; v1(6815,3370) FT232RL.20 6815,3890 6870,3890 ; RG1.2 6870,3890 ; RR1.2@7030,3890 6870,3890 ; RR1.2@7044,3894 7165,3894 ; B0505S-1W.2@7590,4430 7165,4430 ; USB-B.1 7165,3894 ; 7165,3894 7165,4430
pads on no net: 1.1 1.4 2.1 2.4 dsPIC33FJ16GS502.4 dsPIC33FJ16GS502.5 dsPIC33FJ16GS502.6 dsPIC33FJ16GS502.7 dsPIC33FJ16GS502.11 dsPIC33FJ16GS502.12 dsPIC33FJ16GS502.16 FT232RL.2 FT232RL.3 FT232RL.6 FT232RL.8 FT232RL.9 FT232RL.10 FT232RL.11 FT232RL.12 FT232RL.13 FT232RL.14 FT232RL.19 FT232RL.24 FT232RL.27 FT232RL.28 PIC-ICSP1.6 U2.1 U2.7 USB-B.5 USB-B.6
copper on no net:
  other v2: 2590,1795 8080,1865 8055,5410 2580,5480

## Keep-outs
Keep-Out Layer:
  lines w10: 2275,5645 2275,1630 8265,1630 8265,5650 2275,5650

## Text inside footprints (layer, text, board x,y; h text height)
USB-B: Top Overlay "MALE" at 8125,3954 h60 r270